# Altium PCB betaV2.0.PcbDoc
Units mm, origin at the board's own origin, x right, y up, seen from the top; angles counter-clockwise.
Board outline 80.01 x 100.08 mm, 2 copper layers (Top Layer, Bottom Layer); 210 components, 112 nets, 560 pads, 14 vias.
Unrouted connection lines stored in the file: 427.
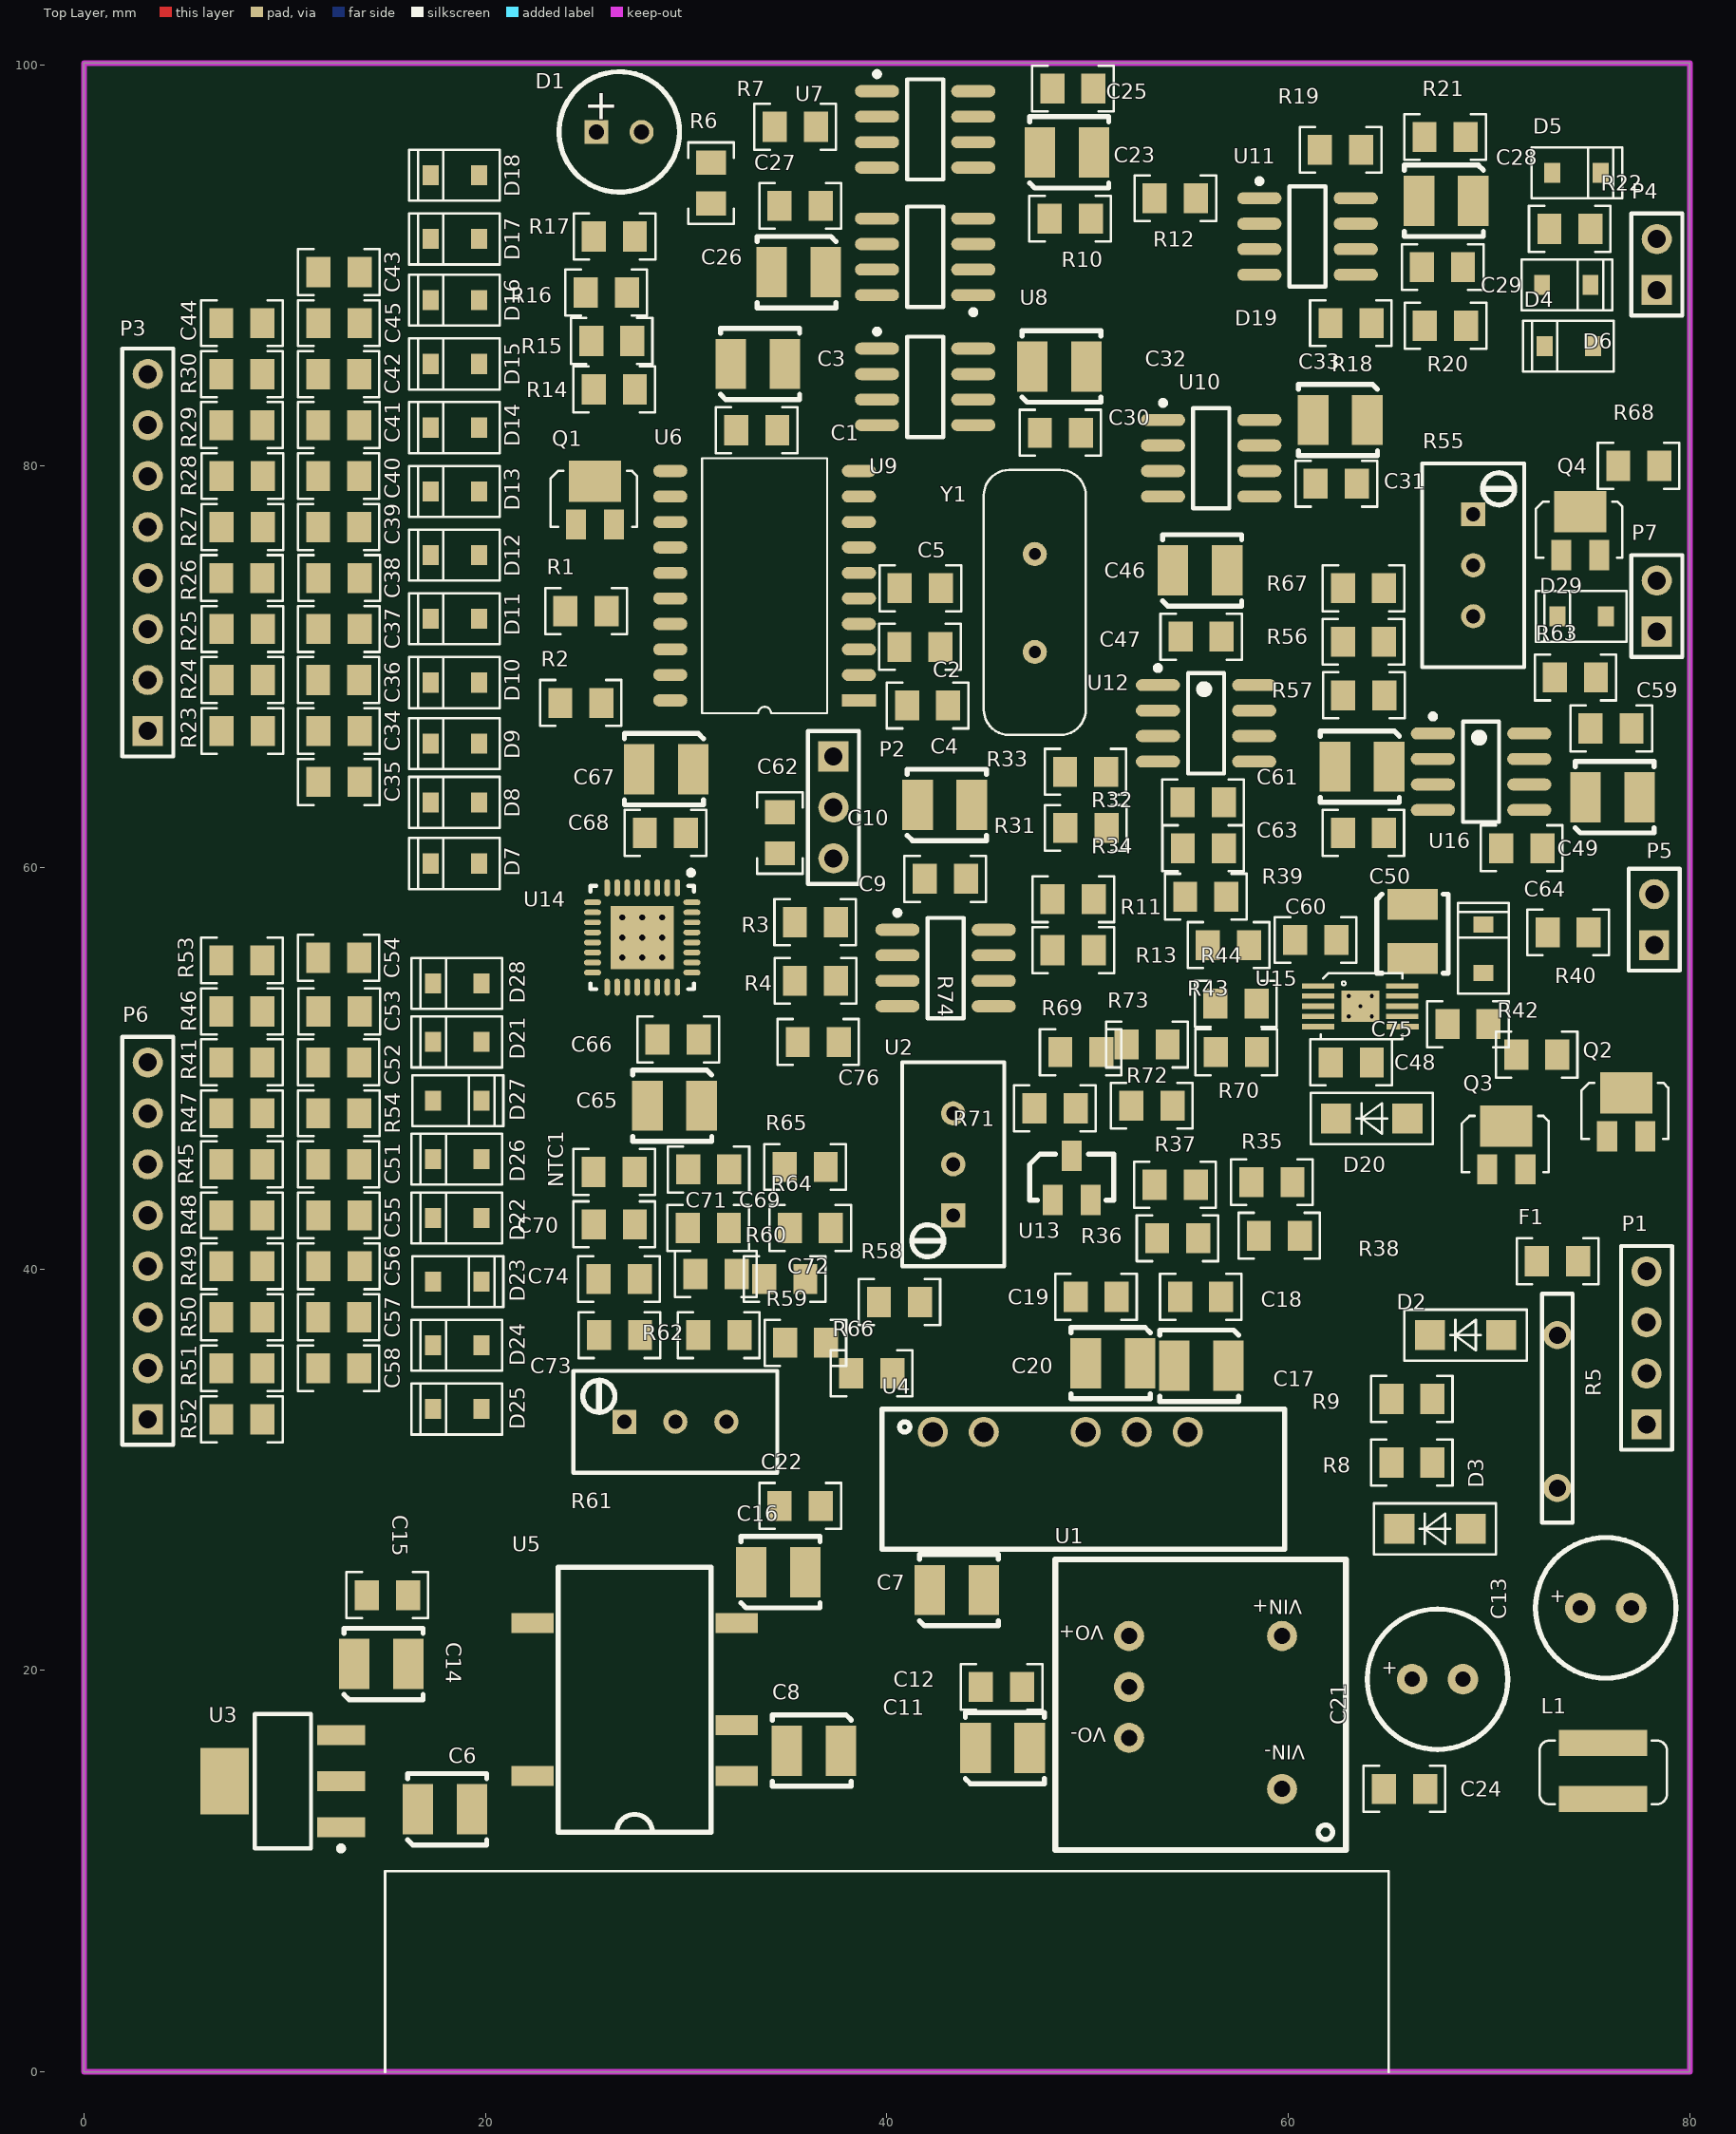
[diagram p0: Top Layer view]
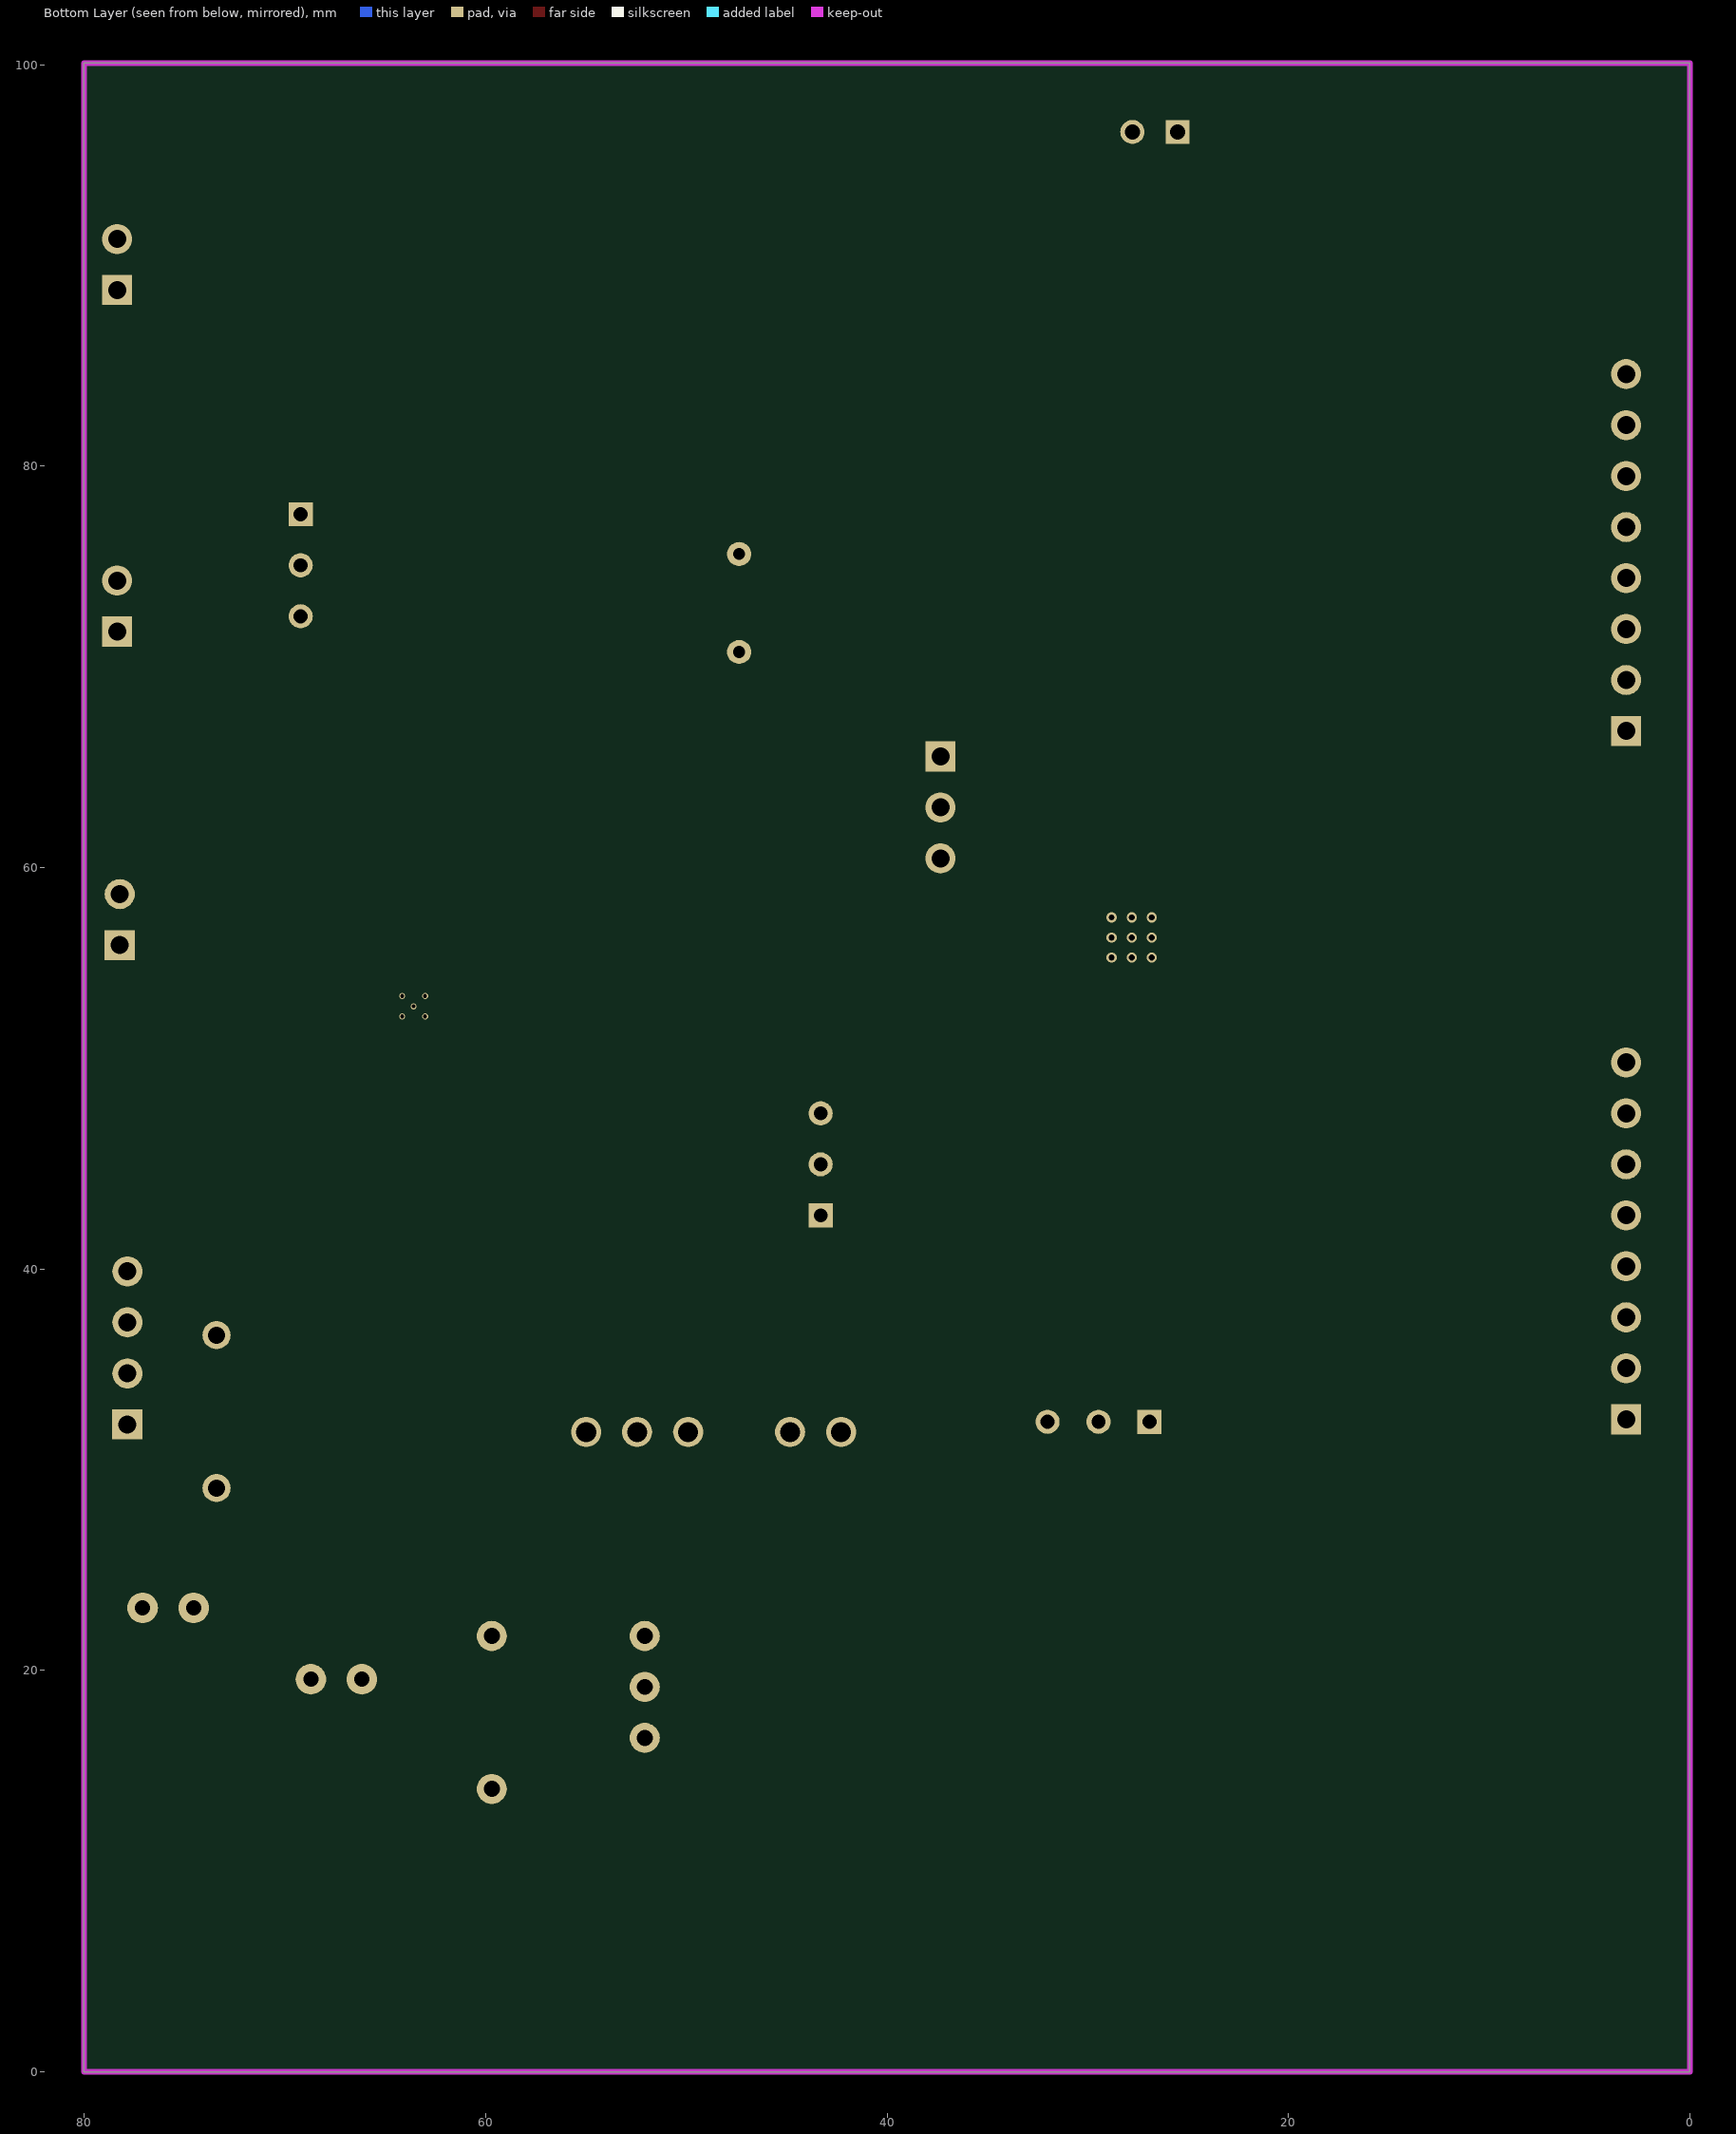
[diagram p1: Bottom Layer view, seen from below]

## Layer stack, top to bottom
Top Solder: solder mask 0.0102, Solder Resist, Dk 3.5
Top Layer: signal copper 0.0356
Dielectric 1: dielectric 0.32, FR-4, Dk 4.8
Bottom Layer: signal copper 0.0356
Bottom Solder: solder mask 0.0102, Solder Resist, Dk 3.5

## Board outline
0,0 0,100.076 80.01,100.076 80.01,0

## Design rules (kind name [scope] priority, off if disabled: settings)
Clearance [All] p1: gap=0.254 ignorepadtopadclearanceinfootprint=FALSE
DiffPairsRouting [InDifferentialPairClass('All Differential Pairs')] p1: maxlimit=0.254 minlimit=0.203 mostfreqgap=0.203 toplayer_minwidth=0.102 toplayer_maxwidth=0.381 toplayer_prefwidth=0.203 bottomlayer_minwidth=0.102 bottomlayer_maxwidth=0.381 bottomlayer_prefwidth=0.203 maxuncoupledlength=12.7
MatchedLengths DiffPair_MatchedLengths [InDifferentialPair ('CHN1')] p1: tolerance=25.4 checknetsindiffpair=FALSE checkdiffpairvsdiffpair=TRUE checkxsignals=TRUE checkothers=TRUE
PolygonConnect [All] p1: connectstyle=Relief reliefconductorwidth=0.254 reliefentries=4 polygonreliefangle="90 Angle" airgapwidth=0.254
RoutingVias [All] p1: holewidth=0.711 width=1.27 viastyle="Through Hole" minholewidth=0.711 minwidth=1.27 maxholewidth=0.711 maxwidth=1.27
ShortCircuit [All] p1: allowed=TRUE
SolderMaskExpansion [All] p1: expansion=0.102 istentingtop=FALSE
Width [All] p1: maxlimit=1.016 minlimit=0.203 preferedwidth=0.203
28 further rules are at their usual default settings.

## Classes and differential pairs
differential pair CHN5: +CHN5_P -CHN5_N
differential pair CHN7: +CHN7_P -CHN7_N
differential pair CHN6: +CHN6_P -CHN6_N
differential pair REFIN1: +REFIN1_P -REFIN1_N
differential pair CHN4: +CHN4_P -CHN4_N
differential pair CHN3: +CHN3_P -CHN3_N
differential pair CHN2: +CHN2_P -CHN2_N
differential pair CHN1: +CHN1_P -CHN1_N

## Components (designator, comment, footprint, x,y, rotation, side; value= is the part's Value field where it differs from the comment)
C1 "CC0805MRX7R9BB104" 0805C 32.496,81.788 r0 top value=0.1uF
C2 "CC0805MRX7R9BB330" 0805C 42.672,70.993 r180 top value=33pF
C3 "T494B106M006AHAUTO" CB 32.225,85.09 r90 top value=10uF
C4 "CC0805MRX7R9BB106" 0805C 43.053,68.072 r180 top value=10uF
C5 "CC0805MRX7R9BB330" 0805C 42.688,73.914 r180 top value=33pF
C6 "T494B106M006AHAUTO" CB 16.637,13.081 r90 top value=10uF
C7 "T494B106M006AHAUTO" CB 42.131,24.003 r90 top value=10uF
C8 "T494B106M006AHAUTO" CB 37.719,16.002 r270 top value=10uF
C9 "CC0805MRX7R9BB104" 0805C 41.894,59.436 r0 top value=0.1uF
C10 "T494B106M006AHAUTO" CB 41.529,63.119 r90 top value=10uF
C11 "T494B107M006AHAUTO" CB 44.417,16.129 r90 top value=100uF
C12 "CC0805MRX7R9BB104" 0805C 46.736,19.177 r180 top value=0.1uF
C13 "ECR1HQG100M-063007" Φ6.3×11.5 74.549,23.114 r0 top value=10uF
C14 "T494B476M010AHAUTO" CB 13.462,20.32 r90 top value=47uF
C15 "CC0805MRX7R9BB104" 0805C 14.097,23.749 r0 top value=0.1uF
C16 "T494B106M006AHAUTO" CB 33.241,24.892 r90 top value=10uF
C17 "T494B476K025ATAUTO" CB 57.023,35.179 r270 top value=47uF
C18 "CC0805MRX7R9BB104" 0805C 56.658,38.608 r180 top value=0.1uF
C19 "CC0805MRX7R9BB104" 0805C 49.403,38.608 r0 top value=0.1uF
C20 "T494B476K025ATAUTO" CB 52.611,35.306 r270 top value=47uF
C21 "ECR1HQG100M-063007" Φ6.3×11.5 66.167,19.558 r0 top value=10uF
C22 "CC0805MRX7R9BB104" 0805C 36.703,28.194 r180 top value=0.1uF
C23 "T494B106M006AHAUTO" CB 47.625,95.631 r90 top value=10uF
C24 "CC0805MRX7R9BB104" 0805C 64.77,14.097 r0 top value=0.1uF
C25 "CC0805MRX7R9BB104" 0805C 50.292,98.806 r180 top value=0.1uF
C26 "T494B106M006AHAUTO" CB 36.957,89.662 r270 top value=10uF
C27 "CC0805MRX7R9BB104" 0805C 36.703,92.964 r180 top value=0.1uF
C28 "T494B106M006AHAUTO" CB 69.215,93.218 r270 top value=10uF
C29 "CC0805MRX7R9BB104" 0805C 68.707,89.916 r180 top value=0.1uF
C30 "CC0805MRX7R9BB104" 0805C 47.625,81.661 r0 top value=0.1uF
C31 "CC0805MRX7R9BB104" 0805C 63.413,79.121 r180 top value=0.1uF
C32 "T494B106M006AHAUTO" CB 47.244,84.963 r90 top value=10uF
C33 "T494B106M006AHAUTO" CB 63.938,82.296 r270 top value=10uF
C34 "CC0805MRX7R9BB103" 0805C 11.684,66.802 r0 top value=0.01uF
C35 "CC0805MRX7R9BB104" 0805C 11.684,64.262 r0 top value=0.1uF
C36 "CC0805MRX7R9BB103" 0805C 11.668,69.342 r0 top value=0.01uF
C37 "CC0805MRX7R9BB103" 0805C 11.684,71.882 r0 top value=0.01uF
C38 "CC0805MRX7R9BB104" 0805C 13.732,74.422 r180 top value=0.1uF
C39 "CC0805MRX7R9BB103" 0805C 11.668,76.962 r0 top value=0.01uF
C40 "CC0805MRX7R9BB103" 0805C 11.668,79.502 r0 top value=0.01uF
C41 "CC0805MRX7R9BB104" 0805C 13.716,82.042 r180 top value=0.1uF
C42 "CC0805MRX7R9BB103" 0805C 11.668,84.582 r0 top value=0.01uF
C43 "CC0805MRX7R9BB103" 0805C 11.684,89.662 r0 top value=0.01uF
C44 "CC0805MRX7R9BB104" 0805C 8.89,87.122 r180 top value=0.1uF
C45 "CC0805MRX7R9BB103" 0805C 11.684,87.122 r0 top value=0.01uF
C46 "T494B106M006AHAUTO" CB 54.253,74.803 r90 top value=10uF
C47 "CC0805MRX7R9BB104" 0805C 56.682,71.501 r180 top value=0.1uF
C48 "CC0805MRX7R9BB103" 0805C 62.111,50.292 r0 top value=0.01uF
C49 "T494B106M025AHAUTO" CB 74.803,63.5 r90 top value=10uF
C50 "T494B106M025AHAUTO" CB 66.191,58.166 r0 top value=10uF
C51 "CC0805MRX7R9BB103" 0805C 11.668,45.212 r0 top value=0.01uF
C52 "CC0805MRX7R9BB104" 0805C 11.668,50.292 r0 top value=0.1uF
C53 "CC0805MRX7R9BB104" 0805C 13.732,52.832 r180 top value=0.1uF
C54 "CC0805MRX7R9BB103" 0805C 11.668,55.499 r0 top value=0.01uF
C55 "CC0805MRX7R9BB103" 0805C 11.684,42.672 r0 top value=0.01uF
C56 "CC0805MRX7R9BB104" 0805C 11.684,40.132 r0 top value=0.1uF
C57 "CC0805MRX7R9BB103" 0805C 11.668,37.592 r0 top value=0.01uF
C58 "CC0805MRX7R9BB103" 0805C 11.668,35.052 r0 top value=0.01uF
C59 "CC0805MRX7R9BB104" 0805C 77.105,66.929 r180 top value=0.1uF
C60 "CC0805MRX7R9BB104" 0805C 60.349,56.388 r0 top value=0.1uF
C61 "T494B106M025AHAUTO" CB 65.024,65.024 r270 top value=10uF
C62 "CC0805MRX7R9BB104" 0805C 34.671,60.706 r90 top value=0.1uF
C63 "CC0805MRX7R9BB104" 0805C 62.722,61.722 r0 top value=0.1uF
C64 "CC0805MRX7R9BB104" 0805C 70.612,60.96 r0 top value=0.1uF
C65 "T494B106M006AHAUTO" CB 30.767,48.133 r270 top value=10uF
C66 "CC0805MRX7R9BB104" 0805C 30.623,51.435 r180 top value=0.1uF
C67 "T494B106M006AHAUTO" CB 30.353,64.897 r270 top value=10uF
C68 "CC0805MRX7R9BB104" 0805C 29.988,61.722 r180 top value=0.1uF
C69 "CC0805MRX7R9BB103" 0805C 30.083,42.037 r0 top value=0.01uF
C70 "CC0805MRX7R9BB104" 0805C 25.4,42.224 r0 top value=0.1uF
C71 "CC0805MRX7R9BB103" 0805C 30.099,44.958 r0 top value=0.01uF
C72 "CC0805MRX7R9BB103" 0805C 30.464,39.751 r0 top value=0.01uF
C73 "CC0805MRX7R9BB104" 0805C 25.654,36.703 r0 top value=0.1uF
C74 "CC0805MRX7R9BB103" 0805C 25.638,39.497 r0 top value=0.01uF
C75 "CC0805MRX7R9BB104" 0805C 67.929,52.197 r0 top value=0.1uF
C76 "CC0805MRX7R9BB104" 0805C 35.56,51.308 r0 top value=0.1uF
D1 "150080GS75000" LEDΦ3.0 25.527,96.647 r0 top
D2 "1N5819HW" SOD123 70.612,36.703 r180 top
D3 "1N5819HW" SOD123 69.088,27.051 r180 top
D4 "SD12CT1" SOD323 75.184,85.979 r180 top
D5 "SD12CT1" SOD323 73.152,94.615 r0 top
D6 "SD12CT1" SOD323 72.644,89.027 r0 top
D7 "SD03C" SOD323 19.685,60.198 r180 top
D8 "SD03C" SOD323 19.685,63.246 r180 top
D9 "SD03C" SOD323 19.685,66.167 r180 top
D10 "SD03C" SOD323 19.685,69.215 r180 top
D11 "SD03C" SOD323 19.685,72.39 r180 top
D12 "SD03C" SOD323 19.685,75.565 r180 top
D13 "SD03C" SOD323 19.685,78.74 r180 top
D14 "SD03C" SOD323 19.685,81.915 r180 top
D15 "SD03C" SOD323 19.685,85.09 r180 top
D16 "SD03C" SOD323 19.685,88.265 r180 top
D17 "SD03C" SOD323 19.685,91.313 r180 top
D18 "SD03C" SOD323 19.685,94.488 r180 top
D19 "SD15CT1" SOD323 69.723,54.737 r90 top
D20 "RB160MM-50TF" SOD123 65.937,47.498 r180 top
D21 "SD03C" SOD323 19.812,51.308 r180 top
D22 "SD03C" SOD323 19.812,42.545 r180 top
D23 "SD03C" SOD323 17.399,39.37 r0 top
D24 "SD03C" SOD323 19.812,36.195 r180 top
D25 "SD03C" SOD323 19.812,33.02 r180 top
D26 "SD03C" SOD323 19.812,45.466 r180 top
D27 "SD03C" SOD323 17.399,48.387 r0 top
D28 "SD03C" SOD323 19.812,54.229 r180 top
D29 "SD15CT1" SOD323 75.819,72.517 r180 top
F1 "Fuse 1" 0805R 74.438,40.386 r180 top
L1 "VLS4012HBX-150M" VLS4012 75.692,16.383 r0 top value=15uH
NTC1 "NTCS0805E3103JHT" 0805R 27.432,44.831 r180 top
P1 "Header 4" HDR1X4 77.851,32.258 r90 top
P2 "Header 3" HDR1X3 37.338,65.532 r270 top
P3 "Header 8" HDR1X8 3.175,66.802 r90 top
P4 "Header 2" HDR1X2 78.359,88.773 r90 top
P5 "Header 2" HDR1X2 78.232,56.134 r90 top
P6 "Header 8" HDR1X8 3.175,32.512 r90 top
P7 "Header 2" HDR1X2 78.359,71.755 r90 top
Q1 "MMSS8050" SOT-23-BJT 24.511,77.089 r0 top
Q2 "SS8550" SOT-23-BJT 75.885,46.609 r0 top
Q3 "SI2309" SOT-23-MOS 69.916,44.958 r0 top
Q4 "MMSS8050" SOT-23-BJT 73.599,75.565 r0 top
R1 "RC0805JR-07120RL" 0805R 26.035,72.771 r180 top value=120
R2 "RC0805JR-0710KL" 0805R 23.733,68.199 r0 top value=10K
R3 "RC0805JR-07470RL" 0805R 35.417,57.277 r0 top value=470
R4 "RC0805JR-073300RL" 0805R 37.465,54.356 r180 top value=3.3K
R5 "10D470K" mov 73.406,32.893 r90 top
R6 "RC0805JR-0710KRL" 0805R 31.242,93.075 r90 top value=10K
R7 "RC0805JR-07470RL" 0805R 34.417,96.901 r0 top value=470
R8 "PNP-200KJBJ26-10R" 0805R 65.135,30.353 r0 top value=10
R9 "PNP-200KJBJ26-10R" 0805R 65.135,33.528 r0 top value=10
R10 "RC0805JR-0710KRL" 0805R 48.117,92.329 r0 top value=10K
R11 "RC0805JR-071KL" 0805R 50.308,58.42 r180 top value=1K
R12 "RC0805JR-07470RL" 0805R 55.388,93.345 r180 top value=470
R13 "RC0805JR-071KL" 0805R 50.308,55.88 r180 top value=1K
R14 "RC0805JR-07470RL" 0805R 25.4,83.82 r0 top value=470
R15 "RC0805JR-07470RL" 0805R 25.273,86.233 r0 top value=470
R16 "RC0805JR-07470RL" 0805R 25.003,88.646 r0 top value=470
R17 "RC0805JR-07470RL" 0805R 27.448,91.44 r180 top value=470
R18 "RC0805JR-0720RL" 0805R 62.103,87.122 r0 top value=20
R19 "RC0805JR-0720RL" 0805R 63.627,95.758 r180 top value=20
R20 "RC0805JR-0710KL" 0805R 68.85,86.995 r180 top value=10K
R21 "RC0805JR-0710KL" 0805R 68.834,96.393 r180 top value=10K
R22 "RC0805JR-07120RL" 0805R 73.009,91.821 r0 top value=120
R23 "RC0805JR-071KL" 0805R 8.906,66.802 r180 top value=1K
R24 "RC0805JR-071KL" 0805R 8.906,69.342 r180 top value=1K
R25 "RC0805JR-071KL" 0805R 8.906,71.882 r180 top value=1K
R26 "RC0805JR-071KL" 0805R 8.89,74.422 r180 top value=1K
R27 "RC0805JR-071KL" 0805R 8.906,76.962 r180 top value=1K
R28 "RC0805JR-071KL" 0805R 8.906,79.502 r180 top value=1K
R29 "RC0805JR-071KL" 0805R 8.89,82.042 r180 top value=1K
R30 "RC0805JR-071KL" 0805R 8.89,84.582 r180 top value=1K
R31 "RC0805JR-071KL" 0805R 48.895,61.976 r0 top value=1K
R32 "RC0805JR-071KL" 0805R 54.737,63.246 r0 top value=1K
R33 "RC0805JR-071KL" 0805R 48.879,64.77 r0 top value=1K
R34 "RC0805JR-071KL" 0805R 54.745,60.96 r0 top value=1K
R35 "RC0805JR-073KL" 0805R 58.166,44.323 r0 top value=3K
R36 "RC0805JR-0710KL" 0805R 53.467,41.529 r0 top value=10K
R37 "RC0805JR-073KL" 0805R 53.34,44.196 r0 top value=3K
R38 "RC0805JR-0710KL" 0805R 58.531,41.656 r0 top value=10K
R39 "RC0805JR-000KL" 0805R 56.912,58.547 r180 top value=0R
R40 "RC0805JR-0715RL" 0805R 72.922,56.769 r0 top value=15
R41 "RC0805JR-075600RL" 0805R 8.89,50.292 r180 top value=5.6K
R42 "RC0805JR-0715RL" 0805R 71.358,50.673 r0 top value=15
R43 "RC0805JR-075600RL" 0805R 56.372,53.213 r0 top value=5.6K
R44 "RC0805JR-078200RL" 0805R 58.039,56.134 r180 top value=8.2K
R45 "RC0805JR-071KL" 0805R 8.89,45.212 r180 top value=1K
R46 "RC0805JR-071KL" 0805R 8.89,52.832 r180 top value=1K
R47 "RC0805JR-071KL" 0805R 8.89,47.752 r180 top value=1K
R48 "RC0805JR-071KL" 0805R 8.89,42.672 r180 top value=1K
R49 "RC0805JR-071KL" 0805R 8.89,40.132 r180 top value=1K
R50 "RC0805JR-071KL" 0805R 8.89,37.592 r180 top value=1K
R51 "RC0805JR-07470RL" 0805R 8.89,35.052 r180 top value=470
R52 "RC0805JR-07470RL" 0805R 8.89,32.512 r180 top value=470
R53 "RC0805JR-07470RL" 0805R 8.89,55.372 r180 top value=470
R54 "RC0805JR-07100RL" 0805R 13.716,47.752 r180 top value=100R
R55 "3296W-1-104" POTENTIOMETER-3296W 69.215,75.057 r270 top value=100K
R56 "RC0805JR-07100ML" 0805R 62.722,71.247 r0 top value=100M
R57 "RC0805JR-072KL" 0805R 64.786,68.58 r180 top value=2K
R58 "RC0805JR-075600RL" 0805R 39.608,38.354 r0 top value=5.6K
R59 "RC0805JR-071000KL" 0805R 34.925,36.322 r0 top value=1M
R60 "RC0805JR-0768KL" 0805R 33.893,39.497 r0 top value=68K
R61 "3296W-1-102" POTENTIOMETER-3296W 29.464,32.385 r0 top value=1K
R62 "RC0805JR-0768KL" 0805R 30.607,36.703 r0 top value=68K
R63 "RC0805JR-072KL" 0805R 75.327,69.469 r180 top value=2K
R64 "RC0805JR-071KL" 0805R 35.163,42.037 r0 top value=1K
R65 "RC0805JR-071KL" 0805R 34.909,45.085 r0 top value=1K
R66 "RC0805JR-071KL" 0805R 38.227,34.798 r0 top value=1K
R67 "RC0805JR-0710KL" 0805R 64.77,73.914 r180 top value=10K
R68 "RC0805JR-07470RL" 0805R 76.438,80.01 r0 top value=470
R69 "RC0805JR-072KL" 0805R 48.641,50.8 r0 top value=2K
R70 "RC0805JR-072KL" 0805R 56.388,50.8 r0 top value=2K
R71 "RC0805JR-073300RL" 0805R 47.355,48.006 r0 top value=3.3K
R72 "RC0805JR-074700RL" 0805R 52.181,48.133 r0 top value=4.7K
R73 "RC0805JR-07100ML" 0805R 51.943,51.181 r0 top value=100M
R74 "3296W-1-104" POTENTIOMETER-3296W 43.307,45.212 r90 top value=100K
U1 "WRB_ST(SD)-3WR2" WRB_ST(SD)-3WR2 59.69,14.097 r180 top
U2 "VO2630" SO8_N 42.926,54.991 r0 top
U3 "LM1117IMP-3.3/NOPB" SOT223_N 9.906,14.478 r180 top
U4 "A05_S-1WR3" A05_S-1WR3 42.291,31.877 r0 top
U5 "F0505XT-W2R3" F0505XT-W2R3 32.512,14.732 r90 top
U6 "STC12C5620AD" SOP20 38.61,68.326 r180 top
U7 "6N137" SO8_N 41.91,96.774 r0 top
U8 "6N137" SO8_N 41.91,90.424 r180 top
U9 "VO2630" SO8_N 41.91,83.947 r0 top
U10 "VO2630" SO8_N 56.158,80.391 r0 top
U11 "SN65LBC184" SO8_N 60.96,91.44 r0 top
U12 "DAC7611U" TI-D8_N 55.904,67.183 r0 top
U13 "TL431" SOT-23-3 48.26,43.434 r0 top
U14 "AD7124-8" TI-RHB32-3150X3150TP_V 27.813,56.515 r270 top
U15 "XTR111" S-PDSO-G10 61.492,54.102 r0 top
U16 "TL062ACD" TI-D8_N 69.607,64.77 r0 top
Y1 "XTAL" 11.0592MHZ 47.371,75.619 r270 top

## Footprints (in the part's own frame and the unit in brackets; to place one, negate y for a bottom-side part, rotate by r counter-clockwise, add the part's x,y. Pads: shape width x height; smd on the part's side, far side on the other; paste and mask are expansions set on the pad)
11.0592MHZ [mm]
  round 1.2 hole 0.6: 1(0,0) 2(4.88,0)
  silkscreen extent -4.19,-2.54 9.02,2.54, body extent -3.99,-2.29 8.81,2.54, height 4.3
0805C [mm]
  rect 1.2x1.5 smd: 1(0,0) 2(2.048,0)
  silkscreen extent -1.02,-1.14 3.05,1.14, body extent 0.02,-0.65 2.02,0.66, height 0.73
0805R [mm]
  rect 1.2x1.5 smd: 1(0,0) 2(2.048,0)
  silkscreen extent -1.02,-1.14 3.05,1.14, body extent -0.13,-0.67 2.17,0.68, height 0.76
A05_S-1WR3 [mm]
  round 1.5 hole 1: 1(0,0) 2(2.54,0) 4(7.62,0) 5(10.16,0) 6(12.7,0)
  silkscreen extent -2.54,-5.84 17.53,1.14, body extent -2.33,-5.29 17.32,0.71, height 10.16
CB [mm] "Tantalum?Capacitor"
  rect 2.5x1.524 smd: 1(0,0) 2(0,-2.7)
  silkscreen extent -1.78,-3.43 1.78,0.51, body extent -1.48,-3.37 1.52,0.33, height 4.11
F0505XT-W2R3 [mm]
  rect 1x2.1 smd: 1(0,0) 2(2.54,0) 4(7.62,0) 5(7.62,10.16) 8(0,10.16)
  silkscreen extent -2.79,1.27 10.41,8.89, body extent -2.79,-0.61 10.41,10.79, height 5
HDR1X2 [mm] "Connector; Header; 2 Position"
  rect 1.5x1.5 hole 0.9: 1(0,0)
  round 1.5 hole 0.9: 2(2.54,0)
  silkscreen extent -1.27,-1.27 3.81,1.27
HDR1X3 [mm] "Connector; Header; 3 Position"
  rect 1.5x1.5 hole 0.9: 1(0,0)
  round 1.5 hole 0.9: 2(2.54,0) 3(5.08,0)
  silkscreen extent -1.27,-1.27 6.35,1.27
HDR1X4 [mm] "Connector; Header; 4 Position"
  rect 1.5x1.5 hole 0.9: 1(0,0)
  round 1.5 hole 0.9: 2(2.54,0) 3(5.08,0) 4(7.62,0)
  silkscreen extent -1.27,-1.27 8.89,1.27
HDR1X8 [mm] "Connector; Header; 8 Position"
  rect 1.5x1.5 hole 0.9: 1(0,0)
  round 1.5 hole 0.9: 2(2.54,0) 3(5.08,0) 4(7.62,0) 5(10.16,0) 6(12.7,0) 7(15.24,0) 8(17.78,0)
  silkscreen extent -1.27,-1.27 19.05,1.27
LEDΦ3.0 [mm]
  rect 1.2x1.2 hole 0.762: 1(0,0)
  round 1.2 hole 0.762: 2(2.25,0)
  silkscreen extent -1.85,-3 4.14,3, body extent -0.64,-1.9 2.79,1.9, height 4.64
mov [mm] "Axial Device, Thru-Hole; 2 Leads; 0.3 in Pin Spacing"
  round 1.4 hole 0.85: 1(-3.81,0) 2(3.81,0)
  silkscreen extent -5.53,-0.76 5.88,0.76, body extent -5.5,-0.9 5.8,0.95, height 18.5
POTENTIOMETER-3296W [mm] "Thru-Hole; 3 Leads"
  rect 1.2x1.2 hole 0.7: 1(-2.54,0)
  round 1.2 hole 0.7: 2(0,0) 3(2.54,0)
  silkscreen extent -5.08,-2.54 5.08,2.54, body extent -4.78,-2.41 4.78,2.41, height 6.3
S-PDSO-G10 [mm]
  rect 1.6x0.27 smd: 1(0,0) 2(0,-0.508) 3(0,-1.016) 4(0,-1.524) 5(0,-2.032) 6(4.2,-2.032) 7(4.191,-1.524) 8(4.191,-1.016) 9(4.191,-0.508) 10(4.191,0)
  rect 1.88x1.57 smd: 12(2.1,-1.016)
  silkscreen extent 0.13,-2.67 4.19,0.64
SO8_N [mm] "SOIC, 8-Leads, Body 4.9x3.9mm, Pitch 1.27mm, IPC Medium Density"
  oval 2.2x0.6 smd: 1(-2.4,1.905) 2(-2.4,0.635) 3(-2.4,-0.635) 4(-2.4,-1.905) 5(2.4,-1.905) 6(2.4,-0.635) 7(2.4,0.635) 8(2.4,1.905)
  silkscreen extent -2.52,-2.5 0.9,2.88, body extent -2,-2.5 2,2.5, height 1.75
SOD123 [mm]
  rect 1.5x1.5 smd: 1(0,0) 2(3.556,0)
  silkscreen extent -1.27,-1.27 4.83,1.27, body extent -0.2,-0.8 3.5,0.8, height 1.27
SOD323 [mm]
  rect 0.8x1 smd: 1(0,0) 2(2.413,0)
  silkscreen extent -1.03,-1.27 3.49,1.27, body extent -0.16,-0.68 2.44,0.67, height 1.1
SOP20 [mm]
  rect 1.7x0.6 smd: 1(0,0)
  oval 1.7x0.6 smd: 2(0,-1.27) 3(0,-2.54) 4(0,-3.81) 5(0,-5.08) 6(0,-6.35) 7(0,-7.62) 8(0,-8.89) 9(0,-10.16) 10(0,-11.43) 11(9.4,-11.43) 12(9.4,-10.16) 13(9.4,-8.89) 14(9.4,-7.62) 15(9.4,-6.35) 16(9.4,-5.08) 17(9.4,-3.81) 18(9.4,-2.54) 19(9.4,-1.27) 20(9.4,0)
  silkscreen extent 1.58,-12.06 7.82,0.64, body extent -0.45,-12.07 9.85,0.63, height 2.51
SOT223_N [mm] "SOT223, 4-Leads, Body 6.5x3.5mm, Pitch 2.3mm, Lead Span 7mm, IPC Medium Density"
  rect 2.4x1 smd: 1(-2.9,2.3) 2(-2.9,0) 3(-2.9,-2.3)
  rect 2.4x3.3 smd: 4(2.9,0)
  silkscreen extent -3.03,-3.35 1.4,3.47, body extent -1.85,-3.35 1.85,3.35, height 1.7
SOT-23-3 [mm]
  rect 1x1.524 smd: 1(0,0) 2(1.9,0) 3(0.95,2.2)
  silkscreen extent -1.14,0 3.05,2.29, body extent -0.55,-0.23 2.45,2.27, height 0.55
SOT-23-BJT [mm]
  rect 2.6x2.05 smd: 1(0.95,2.159)
  rect 1x1.5 smd: 2(0,0) 3(1.9,0)
  silkscreen extent -1.27,-0.13 3.05,2.67, body extent -0.55,-0.23 2.45,2.27, height 0.55
SOT-23-MOS [mm]
  rect 1x1.5 smd: 1(0,0) 3(1.9,0)
  rect 2.6x2.05 smd: 2(0.95,2.159)
  silkscreen extent -1.27,-0.13 3.05,2.67, body extent -0.55,-0.11 2.45,2.39, height 0.55
TI-D8_N [mm] "SOIC, 8-Leads, Body 4.9x3.9mm, Pitch 1.27mm, IPC Medium Density"
  oval 2.2x0.6 smd: 1(-2.4,1.905) 2(-2.4,0.635) 3(-2.4,-0.635) 4(-2.4,-1.905) 5(2.4,-1.905) 6(2.4,-0.635) 7(2.4,0.635) 8(2.4,1.905)
  silkscreen extent -2.52,-2.5 0.9,2.88, body extent -2,-2.5 2,2.5, height 1.75
TI-RHB32-3150X3150TP_V [mm] "QFN, 32-Leads, Body 5x5mm, Pitch 0.5mm, Thermal Pad 3.15x3.15mm"
  oval 0.85x0.28 smd: 1(-2.475,1.75) 2(-2.475,1.25) 3(-2.475,0.75) 4(-2.475,0.25) 5(-2.475,-0.25) 6(-2.475,-0.75) 7(-2.475,-1.25) 8(-2.475,-1.75) 17(2.475,-1.75) 18(2.475,-1.25) 19(2.475,-0.75) 20(2.475,-0.25) 21(2.475,0.25) 22(2.475,0.75) 23(2.475,1.25) 24(2.475,1.75)
  oval 0.28x0.85 smd: 9(-1.75,-2.475) 10(-1.25,-2.475) 11(-0.75,-2.475) 12(-0.25,-2.475) 13(0.25,-2.475) 14(0.75,-2.475) 15(1.25,-2.475) 16(1.75,-2.475) 25(1.75,2.475) 26(1.25,2.475) 27(0.75,2.475) 28(0.25,2.475) 29(-0.25,2.475) 30(-0.75,2.475) 31(-1.25,2.475) 32(-1.75,2.475)
  rect 3.15x3.15 smd: 33(0,0)
  silkscreen extent -3.35,-2.58 2.58,2.57, body extent -2.5,-2.5 2.5,2.5, height 1
VLS4012 [mm]
  rect 4.4x1.3 smd: 1(0,0) 2(0,-2.8)
  silkscreen extent -3.17,-3.05 3.17,0.13, body extent -2.03,-3.62 2.03,0.83, height 1.7
WRB_ST(SD)-3WR2 [mm] "WRB_ST(SD)-3WR2"
  round 1.5 hole 0.8: 1(0,0) 4(0,-7.62) 5(7.62,-7.62) 6(7.62,-5.08) 7(7.62,-2.54)
  silkscreen extent -3.18,-11.43 11.3,3.05, body extent -2.94,-11.19 11.06,2.81, height 9
Φ6.3×11.5 [mil]
  round 60 hole 30: 1(0,0) 2(100,0)
  silkscreen extent -88,-138 188,138, body extent -75,-125 175,125, height 454

## Part data
C1 C2 C4 C5 C9 C12 C15 C18 C19 C22 C24 C25 C27 C29 C30 C31 C34 C35 C36 C37 C38 C39 C40 C41 C42 C43 C44 C45 C47 C48 C51 C52 C53 C54 C55 C56 C57 C58 C59 C60 C62 C63 C64 C66 C68 C69 C70 C71 C72 C73 C74 C75 C76: library part Cap, "Capacitor"
  C2 C5 C9 C12 C15 C18 C19 C22 C24 C25 C27 C29 C30 C31 C34 C35 C36 C37 C38 C39 C40 C41 C42 C43 C44 C45 C47 C48 C51 C52 C53 C54 C55 C56 C57 C58 C59 C60 C62 C63 C64 C66 C68 C69 C70 C71 C72 C73 C74 C75 C76: LatestRevisionDate=17-Jul-2002, LatestRevisionNote="Re-released for DXP Platform.", PackageDescription="Radial Cap, Thru-Hole; 2 Leads; 0.3 in Pin Spacing", PackageReference=RAD-0.3, Published=8-Jun-2000, Publisher="Altium Limited"
C3 C6 C7 C8 C10 C11 C13 C14 C16 C17 C20 C21 C23 C26 C28 C32 C33 C46 C49 C50 C61 C65 C67: library part "Cap Pol1", "Polarized Capacitor (Radial)", LatestRevisionDate=17-Jul-2002, LatestRevisionNote="Re-released for DXP Platform.", PackageDescription="Polarized Capacitor (Radial); 2 Leads", PackageReference=RB7.6-15, Published=8-Jun-2000, Publisher="Altium Limited"
D1: library part LED2, "Typical RED, GREEN, YELLOW, AMBER GaAs LED", LatestRevisionDate=17-Jul-2002, LatestRevisionNote="Re-released for DXP Platform.", PackageDescription="SM LED; 2 Flat Leads", PackageReference=3.2X1.6X1.1, PackageVersion=Feb-2002, Published=8-Jun-2000, Publisher="Altium Limited"
D2 D3: library part Diode, "Default Diode", Code_JEDEC=DO-214-AB, LatestRevisionDate=17-Jul-2002, LatestRevisionNote="Re-released for DXP Platform.", PackageDescription="DO-214-AB/SMC; 2 C-Bend Leads; Body 7.9 x 5.9 mm, inc. leads (LxW)", PackageReference=SMC, PackageVersion=Sep-1996, Published=8-Jun-2000, Publisher="Altium Limited"
D4 D5 D6 D19 D29: library part "D Zener", "Zener Diode", LatestRevisionDate=17-Jul-2002, LatestRevisionNote="Re-released for DXP Platform.", PackageDescription="Diode, Thru-Hole; 2 Leads; 0.7 in Pin Spacing", PackageReference=DIODE-0.7, Published=8-Jun-2000, Publisher="Altium Limited"
D7 D8 D9 D10 D11 D12 D13 D14 D15 D16 D17 D18 D21 D22 D23 D24 D25 D26 D27 D28: library part "TVS DIODE"
D20: library part "D Schottky", "Schottky Diode", Code_JEDEC=DO-214-AA, LatestRevisionDate=17-Jul-2002, LatestRevisionNote="Re-released for DXP Platform.", PackageDescription="DO-214-AA/SMB; 2 C-Bend Leads; Body 5.3 x 3.6 mm, inc. leads (LxW)", PackageReference=SMB, Published=8-Jun-2000, Publisher="Altium Limited"
F1: "Fuse", LatestRevisionDate=17-Jul-2002, LatestRevisionNote="Re-released for DXP Platform.", PackageDescription="Thru-Hole; 2 Leads", PackageReference=PIN-W2/E2.8, Published=8-Jun-2000, Publisher="Altium Limited"
L1: library part Inductor
NTC1 R5: library part "Res Varistor", "Varistor (Voltage-Sensitive Resistor)", Code_IPC=RESC2012, LatestRevisionDate=29-May-2009, LatestRevisionNote="IPC-7351 Footprint Added.", PackageDescription="Chip Resistor 0805 Case Size", PackageReference=6-0805, PackageVersion=Mar-2003, Published=24-Mar-1999, Publisher="Altium Limited"
P1: "Header, 4-Pin", LatestRevisionDate=17-Jul-2002, LatestRevisionNote="Re-released for DXP Platform.", Publisher="Altium Limited"
P2: "Header, 3-Pin", LatestRevisionDate=17-Jul-2002, LatestRevisionNote="Re-released for DXP Platform.", Publisher="Altium Limited"
P3 P6: "Header, 8-Pin", LatestRevisionDate=17-Jul-2002, LatestRevisionNote="Re-released for DXP Platform.", Publisher="Altium Limited"
P4 P5 P7: "Header, 2-Pin", LatestRevisionDate=17-Jul-2002, LatestRevisionNote="Re-released for DXP Platform.", Publisher="Altium Limited"
Q1 Q4: library part NPN, "NPN Bipolar Transistor", Code_JEDEC=TO-226-AA, LatestRevisionDate=17-Jul-2002, LatestRevisionNote="Re-released for DXP Platform.", PackageDescription="TO, Flat Index; 3 In-Line, Axial Leads; Body Dia. 4.8mm; Leads 0.55 x 0.51 mm (max)", PackageReference=TO-226-AA, Published=8-Jun-2000, Publisher="Altium Limited"
Q2: library part PNP, "PNP Bipolar Transistor", LatestRevisionDate=29-May-2009, LatestRevisionNote="IPC-7351 Footprint Added.", PackageDescription="3-Pin SOT-23 Package 0.95 mm Pitch, 2.4 mm Lead Span", PackageReference=SOT-23B, PackageVersion=Aug-1999, Published=8-Jun-2000, Publisher="Altium Limited"
Q3: library part NMOS-2, "N-Channel Power MOSFET", ComponentLink1Description="Manufacturer Link", ComponentLink1URL=http://www.irf.com/, DatasheetVersion=PD-9.814, LatestRevisionDate=17-Jul-2002, LatestRevisionNote="Re-released for DXP Platform.", Note="Pin 2 is electrically connected to pin 4.", PackageDescription="TO, Thru-Hole, Vertical, Heatsink Mounted; 3 In-Line Leads; Pitch 2.54 mm", PackageReference=TO-220AB, PackageVersion=Feb-1997, Published=8-Jun-2000, Publisher="Altium Limited"
R1 R2 R3 R4 R6 R7 R8 R9 R10 R11 R12 R13 R14 R15 R16 R17 R18 R19 R20 R21 R22 R23 R24 R25 R26 R27 R28 R29 R30 R31 R32 R33 R34 R35 R36 R37 R38 R39 R40 R41 R42 R43 R44 R45 R46 R47 R48 R49 R50 R51 R52 R53 R54 R56 R57 R58 R59 R60 R62 R63 R64 R65 R66 R67 R68 R69 R70 R71 R72 R73: library part Res2, "Resistor", LatestRevisionDate=17-Jul-2002, LatestRevisionNote="Re-released for DXP Platform.", PackageDescription="Axial Device, Thru-Hole; 2 Leads; 0.4 in Pin Spacing", PackageReference=AXIAL-0.4, Published=8-Jun-2000, Publisher="Altium Limited"
R55 R61 R74: library part RPot, "Potentiometer", LatestRevisionDate=17-Jul-2002, LatestRevisionNote="Re-released for DXP Platform.", PackageDescription="Variable Resistor, Thru-Hole; 3 Leads", PackageReference=VR5, Published=8-Jun-2000, Publisher="Altium Limited", Set Position=0.5, Sim Note="Enter the Resistance value and the set point into parameter fields."
U3: library part LM1117IMP
U11: library part SNx5LBC184
U12: library part DAC7611
U16: "Low-Power JFET-Input Operational Amplifier, 7 to 36 V, 0 to 70 degC, 8-pin SOIC (D8), Green (RoHS & no Sb/Br)", Manufacturer="Texas Instruments", Rating=Catalog, Supplier Part Number 1=296-7175-5-ND, Total Supply Voltage(Max)(+5V is 5, +/-5V is 10)=36, Total Supply Voltage(Min)(+5V is 5, +/-5V is 10)=7, CMRR(Min)(dB)=80, Code_JEDEC=MS-012, ComponentLink1Description="Manufacturer URL", ComponentLink1URL=http://www.ti.com/, ComponentLink2Description=Datasheet, ComponentLink2URL=http://www.ti.com/lit/ds/symlink/tl062a.pdf, ComponentLink3Description="Package Specification", ComponentLink3URL=http://www.ti.com/litv/pdf/msoi002j, DatasheetVersion=SLOS078J, Eco-Plan="Green (RoHS & no Sb/Br)", GBW(Typ)(MHz)=1, IIB(Max)(pA)=200, Iq per channel(Max)(mA)=0.25, Mounting Technology="Surface Mount", Number of Channels=2, Offset Drift(Typ)(uV/C)=10, PackageDescription="8-Pin Plastic Small Outline, Body 4.9 x 3.9 mm, Pitch 1.27 mm", PackageReference=D8, PackageVersion="4040047-3/M, 06/2011", PartNumber=TL062ACD, Slew Rate(Typ)(V/us)=3.5, Sub Family="General Purpose Amplifier, High Supply Voltage Amplifier (>=30V), Low Power Amp (<=500uA)", Supplier 1=Digi-Key, Supplier 2=Farnell, Supplier 3=Newark, Supplier 4=Mouser, Supplier Part Number 2=9593241, Supplier Part Number 3=08F9224, Supplier Part Number 4=595-TL062ACD, Vio (25C)(Max)(mV)=6, Vn at 1kHz(Typ)(nV/rtHz)=42
Y1: "Crystal Oscillator", LatestRevisionDate=17-Jul-2002, LatestRevisionNote="Re-released for DXP Platform.", PackageDescription="Crystal, Thru-Hole; 2 Leads; Body 3.1 x 8.2 mm (Dia.xH)", PackageReference=R38, Published=8-Jun-2000, Publisher="Altium Limited"

## Via types
v1: diameter 0.5, hole 0.3, Top Layer to Bottom Layer, 9 vias
v2: diameter 0.3, hole 0.2, Top Layer to Bottom Layer, 5 vias

## Nets (pads, with @x,y where several pads share a name; then routed paths per layer and width w, separated by ;. In a path a pad name is that pad's centre, name@x,y a point inside that pad or via, vN(x,y) a via of type N, cw(c..) or ccw(c..) an arc to the next point about the centre after c; other vN are vias at no path point)
3.3VCC: C1.1 C3.1 C4.1 C9.1 C10.1 C14.1 C15.1 C26.1 C27.1 C65.1 C66.1 C67.1 C68.1 R1.1 R6.2 R11.1 R13.1 R53.1 U2.8 U3.3 U6.20 U8.8 U14.2 U14.26
5VDD: C16.1 C22.2 C23.1 C25.1 C28.1 C29.1 C30.1 C31.1 C32.1 C33.1 D4.2 R3.2 R10.2 R12.2 R20.1 R31.1 R32.1 R33.1 R34.1 U5.5 U7.8 U9.8 U10.8 U11.2 U11.3 U11.8
5VIN: C6.1 C7.1 C8.1 C11.1 C12.2 U1.5 U3.1 U4.1 U5.2
5VIN-: C1.2 C2.2 C3.2 C5.2 C6.2 C7.2 C8.2 C9.2 C10.2 C11.2 C12.1 C14.2 C15.2 C26.2 C27.2 C34.2 C36.2 C37.2 C39.2 C40.2 C42.2 C43.2 C45.2 C51.2 C54.2 C55.2 C57.2 C58.2 C62.1 C65.2 C66.2 C67.2 C68.2 C69.2 C71.2 C72.2 C74.2 C76.1 D7.1 D9.1 D10.1 D12.1 D13.1 D15.1 D16.1 D18.1 D21.1 D22.1 D24.1 D25.1 D26.1 P2.3 Q1.3 R2.1 R52.1 R58.1 R62.1 U1.7 U2.5 U3.2 U4.2 U5.1 U6.10 U7.3 U8.5 U9.2 U9.3 U10.2 U10.3 U14.3 U14.23
5VON: R11.2 U2.7 U6.8
15V: C17.1 C18.1 C49.1 C50.1 C59.2 C60.2 D20.2 R4.2 R35.1 R55.2 R68.1 R74.2 U4.6 U15.1 U16.8
-15V: C19.1 C20.2 C61.1 C63.2 R55.1 R74.1 U2.3 U4.4 U16.4
A1: R14.2 U6.15
A2: R15.2 U6.14
A3: R16.2 U6.13
A4: R17.2 U6.12
AIN8: D26.2 D27.2 R54.1 U14.14
AIN11: C58.1 D25.2 R50.1 U14.17
C\S\: U6.16 U14.32
CHN1_N: C44.2 C45.1 D17.1 D18.2 R30.1 U14.4
CHN1_P: C43.1 C44.1 D16.2 D17.2 R29.1 U14.5
CHN2_N: C41.2 C42.1 D14.1 D15.2 R28.1 U14.6
CHN2_P: C40.1 C41.1 D13.2 D14.2 R27.1 U14.7
CHN3_N: C38.2 C39.1 D11.1 D12.2 R26.1 U14.8
CHN3_P: C37.1 C38.1 D10.2 D11.2 R25.1 U14.9
CHN4_N: C35.2 C36.1 D8.1 D9.2 R24.1 U14.10
CHN4_P: C34.1 C35.1 D7.2 D8.2 R23.1 U14.11
CHN5_N: C56.2 C57.1 D23.1 D24.2 R49.1 U14.16
CHN5_P: C55.1 C56.1 D22.2 D23.2 R48.1 U14.15
CHN6_N: C70.2 C71.1 R59.2 R60.1 U14.19
CHN6_P: C69.1 C70.1 R64.1 U14.18
CHN7_N: C73.2 C74.1 R66.1 U14.21
CHN7_P: C72.1 C73.1 R65.1 U14.20
D1: R31.2 U9.7 U12.2
D2: R33.2 U9.6 U12.3
D3: R32.2 U10.7 U12.4
D4: R34.2 U10.6 U12.5
DIN: U6.17 U14.29
DOUT: U6.18 U14.28
Iout: D19.2 P5.2 R40.1
IS: Q2.3 R42.2 U15.2
NetC2_1: C2.1 U6.4 Y1.2
NetC4_2: C4.2 R2.2 U6.1
NetC5_1: C5.1 U6.5 Y1.1
NetC13_1: C13.1 D3.2 L1.1 R8.1 R9.1
NetC48_1: C48.1 D20.1 Q3.3 R40.2
NetC51_1: C51.1 C52.2 R45.1 R54.2
NetC62_2: C62.2 U14.1
NetC64_1: C64.1 R57.1 U16.3
NetC75_2: C75.2 R70.2 R71.2 U15.6
NetC76_2: C76.2 U14.24
NetD1_1: D1.1 R1.2
NetD1_2: D1.2 Q1.1
NetD2_1: D2.1 F1.2 R5.2
NetD2_2: D2.2 R8.2 R9.2
NetD4_1: D4.1 D6.2 P4.1 R18.2 R20.2 R22.2
NetD5_2: D5.2 D6.1 P4.2 R19.1 R21.2 R22.1
NetD29_2: D29.2 P7.1 Q4.3 R63.1
NetF1_1: F1.1 P1.4
NetNTC1_1: NTC1.1 R58.2 R66.2
NetP2_1: P2.1 R7.1 U6.3
NetP2_2: P2.2 R6.1 U6.2 U8.6
NetP3_1: P3.1 R23.2
NetP3_2: P3.2 R24.2
NetP3_3: P3.3 R25.2
NetP3_4: P3.4 R26.2
NetP3_5: P3.5 R27.2
NetP3_6: P3.6 R28.2
NetP3_7: P3.7 R29.2
NetP3_8: P3.8 R30.2
NetP6_1: P6.1 R52.2
NetP6_2: P6.2 R51.2
NetP6_3: P6.3 R50.2
NetP6_4: P6.4 R49.2
NetP6_5: P6.5 R48.2
NetP6_6: P6.6 R41.1 R47.2
NetP6_7: P6.7 R41.2 R45.2 R46.2
NetP6_8: P6.8 R53.2
NetQ2_2: Q2.2 Q3.2 R42.1
NetQ4_1: Q4.1 R68.2
NetQ4_2: Q4.2 R67.1
NetR3_1: R3.1 U2.1
NetR4_1: R4.1 U2.4
NetR7_2: R7.2 U7.2
NetR14_1: R14.1 U9.1
NetR15_1: R15.1 U9.4
NetR16_1: R16.1 U10.1
NetR17_1: R17.1 U10.4
NetR36_1: R36.1 R37.2 R38.1 U13.2
NetR55_3: R55.3 R56.2
NetR56_1: R56.1 R63.2 U16.2
NetR60_2: R60.2 R61.1 R62.2
NetR61_3: R61.3 R64.2
NetR67_2: R67.2 U16.1
NetR69_2: R69.2 U15.7
NetR71_1: R71.1 R72.2 R73.1
NetR73_2: R73.2 R74.3
PowerOK: Q1.2 U6.11
PSW: R51.1 U14.25
REFIN1_N: C53.2 C54.1 D21.2 D28.1 R47.1 U14.13
REFIN1_P: C52.1 C53.1 D27.1 D28.2 R46.1 U14.12
REFOUT: NTC1.2 R59.1 R61.2 R65.2 U14.22
RS485+: R18.1 U11.6
RS485-: R19.2 U11.7
RxD: R12.1 U8.2 U11.1
SCLK: U6.19 U14.30
SGND: C16.2 C22.1 C23.2 C25.2 C28.2 C29.2 C30.2 C31.2 C32.2 C33.2 C46.2 C47.1 D5.1 R21.1 R39.1 U2.2 U5.4 U7.5 U8.3 U9.5 U10.5 U11.5
TxD: R10.1 U7.6 U11.4
VBIAS: R35.2 R37.1 R72.1 U13.1
VG: Q2.1 Q3.1 U15.3
VIN+: C21.1 C24.1 L1.2 U1.4
VIN-: C13.2 C21.2 C24.2 D3.1 P1.1 R5.1 U1.1
VOUT: R57.2 R70.1 U12.8
VREGF: C46.1 C47.2 R43.1 U12.1 U12.6 U15.5
VREGS: R43.2 R44.1 U15.4
±15VGND: C17.2 C18.2 C19.2 C20.1 C48.2 C49.2 C50.2 C59.1 C60.1 C61.2 C63.1 C64.2 C75.1 D19.1 D29.1 P5.1 P7.2 R36.2 R38.2 R39.2 R44.2 R69.1 U4.5 U12.7 U13.3 U15.9 U15.10
±15VON: R13.2 U2.6 U6.9
pads on no net: P1.2 P1.3 U1.6 U3.4 U5.8 U6.6 U6.7 U7.1 U7.4 U7.7 U8.1 U8.4 U8.7 U14.27 U14.31 U14.33 U15.8 U15.12 U16.5 U16.6 U16.7
copper on no net:
  other v1: 26.813,55.515 27.813,55.515 28.813,55.515 26.813,56.515 27.813,56.515 28.813,56.515 26.813,57.515 27.813,57.515 28.813,57.515
  other v2: 63.016,52.578 64.159,52.578 63.592,53.086 63.016,53.594 64.159,53.594

## Keep-outs
Keep-Out Layer:
  the board outline again, w0.3

## Silkscreen, mask and mechanical layers (free items; w line width, h text height)
Top Overlay:
  lines w0.12: 15,0 15,10 65,10 65,0
Mechanical 1:
  the board outline again, w0.3

## Text inside footprints (layer, text, board x,y; h text height)
C13: Top Overlay "+" at 73.025,23.378 h0.7
C21: Top Overlay "+" at 64.643,19.822 h0.7
D1: Top Overlay "+" at 24.892,97.282 h1.52
U1: Top Overlay "VO-" at 50.927,17.145 h0.7 r180; Top Overlay "VO+" at 50.8,22.225 h0.7 r180; Top Overlay "VIN+" at 60.706,23.495 h0.7 r180; Top Overlay "VIN-" at 60.833,16.256 h0.7 r180